# Altium PCB pai.PcbDoc
Units mil, origin at the board's own origin, x right, y up, seen from the top; angles counter-clockwise.
Board outline 2125 x 1500 mil, 2 copper layers (Component Side, Bottom Layer), stack 12.8 mil thick; 52 components, 40 nets, 134 pads, 0 vias.
Unrouted connection lines stored in the file: 92.
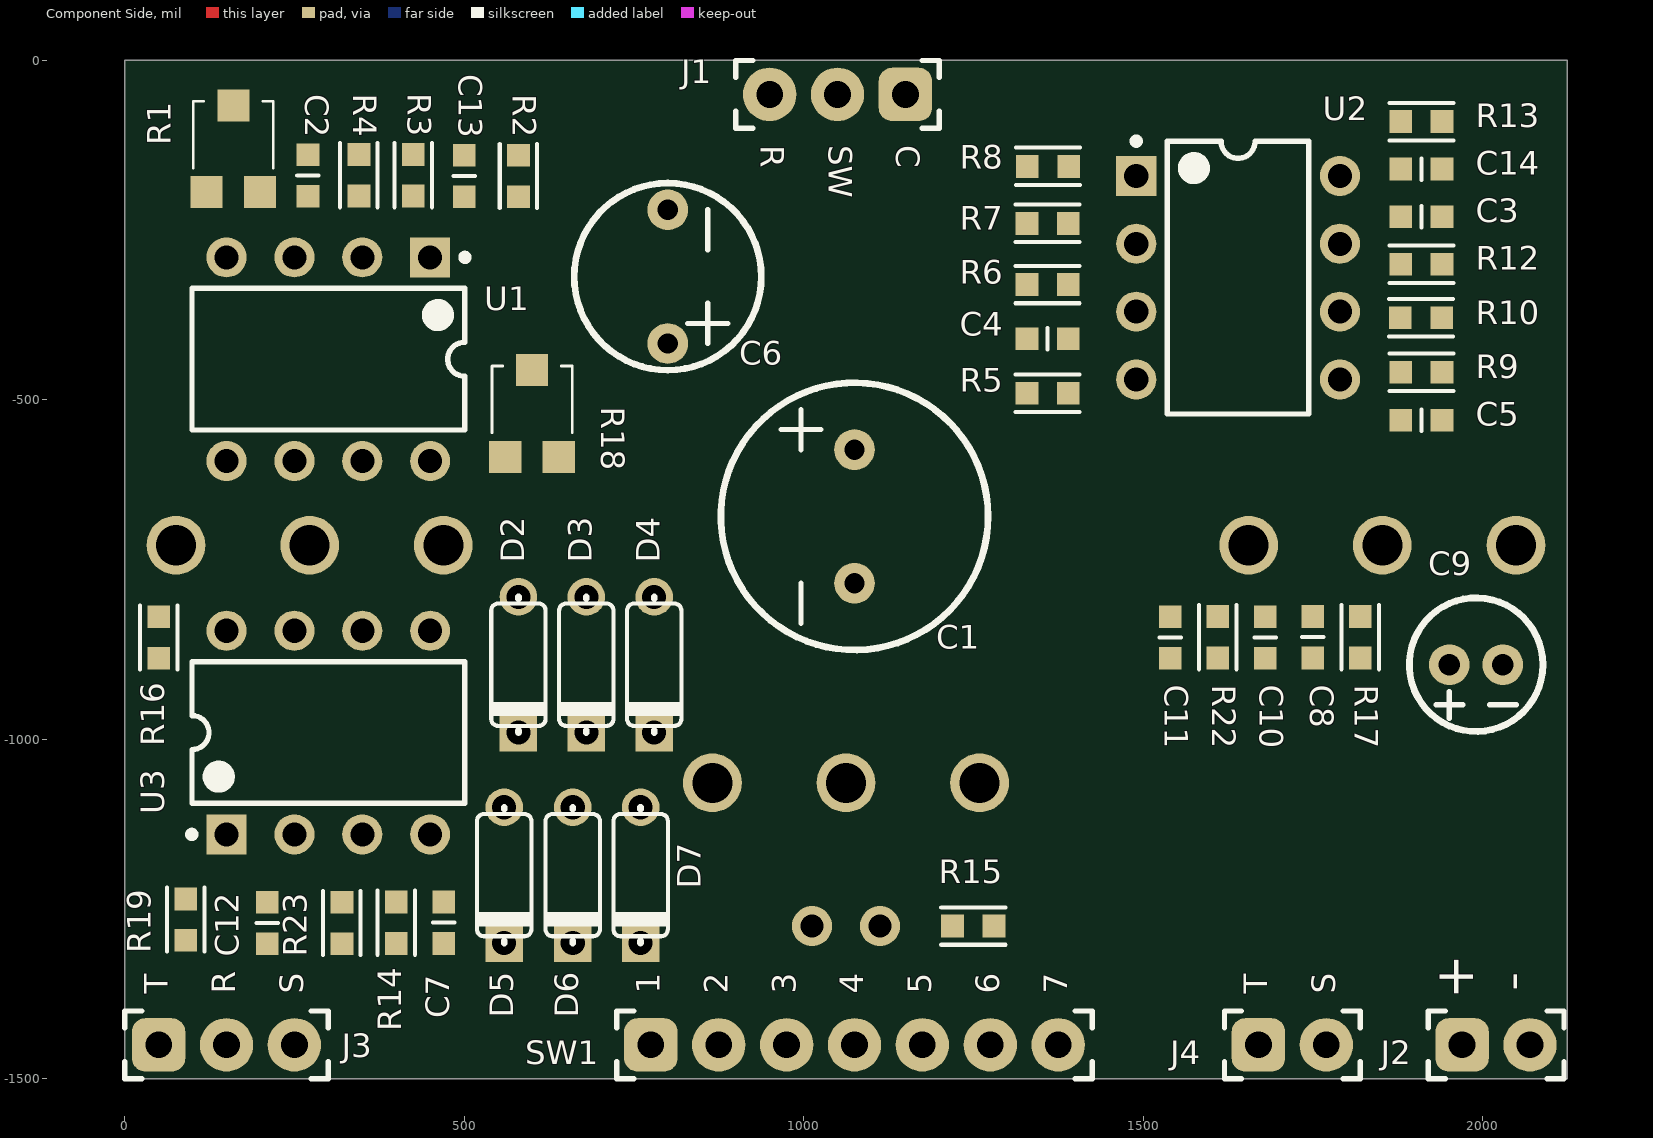
[diagram p0: Component Side view]
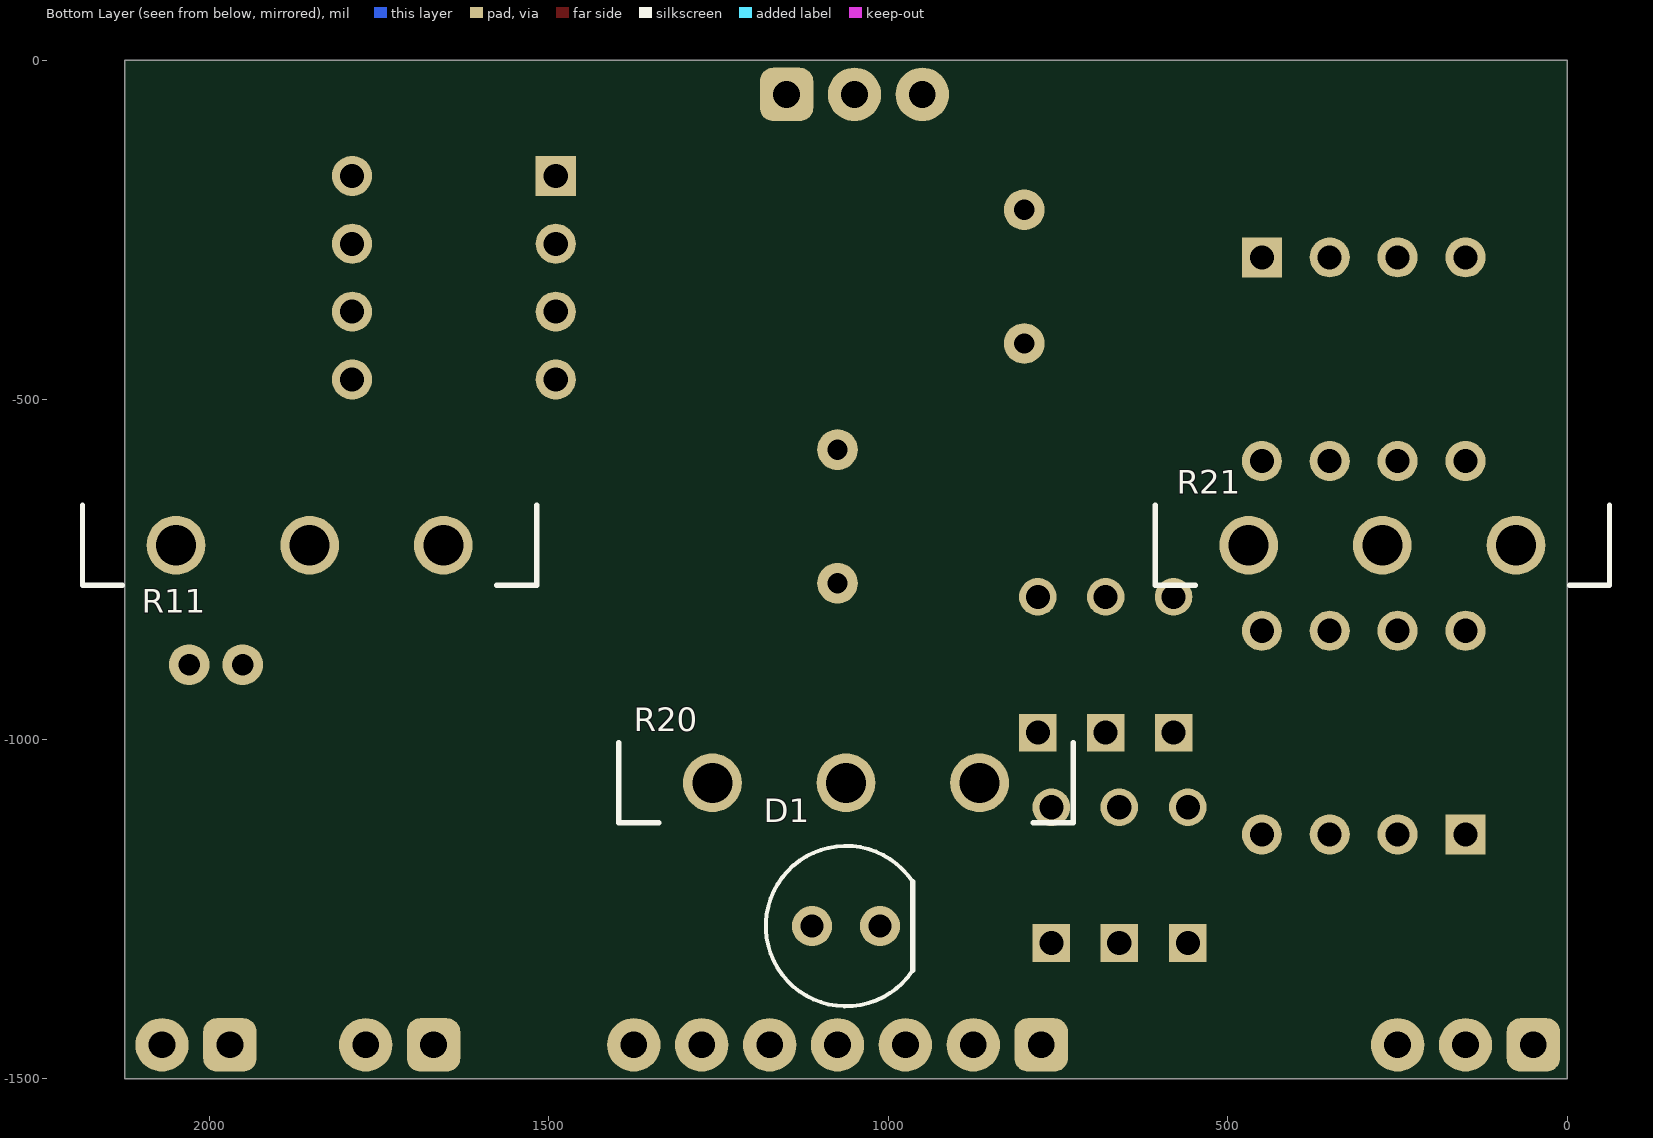
[diagram p1: Bottom Layer view, seen from below]

## Layer stack, top to bottom
Top Solder: solder mask 0.4, Solder Resist, Dk 3.5
Component Side: signal copper 1.4
Dielectric 1: core 10, FR-4, Dk 4.2
Bottom Layer: signal copper 1.4
Solder Side: solder mask 0.4, Solder Resist, Dk 3.5

## Board outline
0,-1500 2125,-1500 2125,0 0,0

## Design rules (kind name [scope] priority, off if disabled: settings)
Clearance [All] p1: gap=10 ignorepadtopadclearanceinfootprint=FALSE except(0: Arc-Hole Track-Hole SMDPad-Hole THPad-Hole Via-Hole Fill-Hole Poly-Hole Region-Hole Text-Hole)
ComponentClearance [All] p1: gap=5 collisioncheckmode=3 verticalgap=10 showdistances=FALSE
Height [All] p1: minheight=0 maxheight=3000 prefheight=500
PolygonConnect [All] p1: connectstyle=Relief reliefconductorwidth=10 reliefentries=4 polygonreliefangle="90 Angle" airgapwidth=10
RoutingVias [All] p1: holewidth=28 width=50 viastyle="Through Hole" minholewidth=28 minwidth=50 maxholewidth=28 maxwidth=50
SolderMaskExpansion [All] p1: expansion=4
Width [All] p1: maxlimit=10 minlimit=10 preferedwidth=10
28 further rules are at their usual default settings.

## Components (designator, comment, footprint, x,y, rotation, side; value= is the part's Value field where it differs from the comment)
C1 "CAP-POL" CAP_TH_10X14_L5 1075,-671.57 r270 top value=220uF
C2 "0.22µF" SMD-0603C 270,-169.49 r180 top
C3 "4700pF" SMD-0603C 1910,-230 r270 top
C4 "0.15µF" SMD-0603C 1359.49,-410 r90 top
C5 "10000pF" SMD-0603C 1910,-530 r90 top
C6 "CAP-POL" CAP_TH_5X12_L5 800,-318.43 r90 top value=10uF
C7 "0.22µF" SMD-0603C 470,-1270 r0 top
C8 "10000pF" SMD-0603C 1750,-849.49 r180 top
C9 "CAP-POL" CAP_TH_5X12_L2 1990.63,-890 r0 top value=4.7uF
C10 "1µF" SMD-0603C 1680,-850 r0 top
C11 "10000pF" SMD-0603C 1540,-850 r0 top
C12 "15pF" SMD-0603C 210,-1270.51 r180 top
C13 "1µF" SMD-0603C 500,-170 r180 top
C14 "1µF" SMD-0603C 1910,-160 r90 top
D1 "LED-Blue" LED_TH_5MM_BLUE 1062.5,-1275 r90 bottom locked
D2 "DIO-GEN" DO35-2_1N914 580,-890 r90 top
D3 "DIO-GEN" DO35-2_1N914 680,-890 r90 top
D4 "DIO-GEN" DO35-2_1N914 780,-890 r90 top
D5 "DIO-GEN" DO35-2_1N914 558.98,-1200 r90 top
D6 "DIO-GEN" DO35-2_1N914 660,-1200 r90 top
D7 "DIO-GEN" DO35-2_1N914 760,-1200 r90 top
J1 "PWR_JACK_SW" PWR_JACK_SW_HDR 1150,-50 r270 top locked
J2 "9V_BATT" PWR_JACK_HDR 1970,-1450 r90 top locked
J3 "STEREO_JACK" STEREO_JACK_HDR 50,-1450 r90 top locked
J4 "MONO_JACK" MONO_JACK_HDR 1670,-1450 r90 top locked
R1 "POT" POT_TT35W 160,-130 r90 top value=1k
R2 "47" SMD-0603-RES 580,-170 r0 top
R3 "220k" SMD-0603-RES 425,-168.98 r180 top
R4 "220k" SMD-0603-RES 345,-168.98 r0 top
R5 "1M" SMD-0603-RES 1359.49,-490 r270 top
R6 "56k" SMD-0603-RES 1359.49,-330 r90 top
R7 "330k" SMD-0603-RES 1359.49,-240 r90 top
R8 "10k" SMD-0603-RES 1360,-156 r270 top
R9 "47k" SMD-0603-RES 1910,-459.02 r270 top
R10 "560k" SMD-0603-RES 1909.49,-379.02 r90 top
R11 "POT" POT_16MM_TH_RA 1852.5,-714 r180 bottom locked value=10k
R12 "62k" SMD-0603-RES 1910,-300 r270 top
R13 "47" SMD-0603-RES 1910,-90 r90 top
R14 "820k" SMD-0603-RES 400,-1270 r0 top
R15 "1.2k" SMD-0603-RES 1250,-1275 r90 top
R16 "1M" SMD-0603-RES 50,-850 r0 top
R17 "1.2k" SMD-0603-RES 1820,-849.49 r0 top
R18 "POT" POT_TT35W 600,-520 r90 top value=1k
R19 "8.2k" SMD-0603-RES 90,-1265.51 r180 top
R20 "POT" POT_16MM_TH_RA 1062.5,-1064 r180 bottom locked value=10k
R21 "POT" POT_16MM_TH_RA 272.5,-714 r180 bottom locked value=100k
R22 "5.23k" SMD-0603-RES 1610,-849.49 r180 top
R23 "470k" SMD-0603-RES 320,-1270.51 r180 top
SW1 "3PDT_SW_SOLDERBOARD" 3PDT_HDR 775,-1450 r90 top locked
U1 "UA741CP" TI-P8 300,-440 r270 top
U2 "RC4558P" TI-P8 1640,-320 r0 top
U3 "UA741CP" TI-P8 300,-990 r90 top

## Footprints (in the part's own frame and the unit in brackets; to place one, negate y for a bottom-side part, rotate by r counter-clockwise, add the part's x,y. Pads: shape width x height; smd on the part's side, far side on the other; paste and mask are expansions set on the pad)
3PDT_HDR [mm] "3PDT Switch on Mammoth Solder-Assist Board, Header Connection"
  rrect50% 2x2 / inner round 2 / far side rrect50% 2x2 hole 1: 1(0,0)
  round 2 hole 1: 2(0,-2.54) 3(0,-5.08) 4(0,-7.62) 5(0,-10.16) 6(0,-12.7) 7(0,-15.24)
  silkscreen extent -1.27,-16.51 1.27,1.27
CAP_TH_5X12_L2 [mil] "Cap, Aluminum Electrolytic, 2mm Lead Spacing, 12.5mm Height, Vertical Mount"
  round 60 hole 31.5: 1(-39.37,0) 2(39.37,0)
  silkscreen extent -98,-98 98,98, body extent -98,-98 98,98, height 433
CAP_TH_5X12_L5 [mil] "Cap, Aluminum Electrolytic, 5mm Lead Spacing, 12mm Height, Vertical Mount"
  round 60 hole 30: 1(-98.43,0) 2(98.43,0)
  silkscreen extent -138,-138 138,138, body extent -124,-124 124,124, height 472
CAP_TH_10X14_L5 [mil] "Cap, Aluminum Electrolytic, 5mm Lead Spacing, 14mm Height, Vertical Mount"
  round 60 hole 30: 1(-98.43,0) 2(98.43,0)
  silkscreen extent -197,-197 197,197, body extent -197,-197 197,197, height 551
DO35-2_1N914 [mm]
  round 1.408 hole 0.9: A(2.54,0)
  rect 1.408x1.408 hole 0.9: K(-2.54,0)
  silkscreen extent -2.54,-1.02 2.54,1.02
LED_TH_5MM_BLUE [mm] "LED, 5mm Through-Hole, Blue"
  round 1.5 hole 0.85: A(0,1.27) K(0,-1.27)
  silkscreen extent -3,-2.5 3,3, body extent -3,-2.43 3.02,2.99, height 14.31
MONO_JACK_HDR [mm] "Audio Jack, Mono, No Switch, Header Connection"
  round 2 hole 1: S(0,-2.54)
  rrect50% 2x2 / inner round 2 / far side rrect50% 2x2 hole 1: T(0,0)
  silkscreen extent -1.27,-3.81 1.27,1.27
POT_16MM_TH_RA [mm] "Potentiometer, 16mm, Through-Hole, Right-Angle"
  round 2.2 hole 1.5: 1(-5,0) 2(0,0) 3(5,0)
  silkscreen extent -8.5,-1.5 8.5,1.5, body extent -8.5,8 8.5,25, height 27.4
POT_TT35W [mm] "Trimmer, 0.1W, Top Adjust"
  rect 1.2x1.2 smd: 1(-1.625,1) 2(1.625,0) 3(-1.625,-1)
  silkscreen extent -0.72,-1.5 1.78,1.5, body extent -1.92,-1.5 1.73,1.5, height 1.81
PWR_JACK_HDR [mm] "DC Power Jack Connector, Header Connections"
  rrect50% 2x2 / inner round 2 / far side rrect50% 2x2 hole 1: 1(0,0)
  round 2 hole 1: 2(0,-2.54)
  silkscreen extent -1.27,-3.81 1.27,1.27
PWR_JACK_SW_HDR [mm] "DC Power Jack Connector with Switch, Header Connection"
  rrect50% 2x2 / inner round 2 / far side rrect50% 2x2 hole 1: C(0,0)
  round 2 hole 1: R(0,-5.08) SW(0,-2.54)
  silkscreen extent -1.27,-6.35 1.27,1.27
SMD-0603-RES [mm]
  rect 0.85x0.85 smd: 1(0,0.775) 2(0,-0.775)
  silkscreen extent -0.7,-1.2 0.7,1.2, body extent -0.4,-0.85 0.4,0.85, height 0.56
SMD-0603C [mm]
  rect 0.85x0.85 smd: 1(0,0.775) 2(0,-0.775)
  silkscreen extent -0.4,0 0.4,0, body extent -0.4,-0.8 0.4,0.8, height 0.9
STEREO_JACK_HDR [mm] "Stereo Jack Connector, Panel Mount, Header Connection"
  round 2 hole 1: R(0,-2.54) S(0,-5.08)
  rrect50% 2x2 / inner round 2 / far side rrect50% 2x2 hole 1: T(0,0)
  silkscreen extent -1.27,-6.35 1.27,1.27
TI-P8 [mm] "DIP, 8-Leads, Body 9.59x6.35mm, Pitch 2.54mm"
  rect 1.5x1.5 hole 0.9: 1(-3.81,3.81)
  round 1.5 hole 0.9: 2(-3.81,1.27) 3(-3.81,-1.27) 4(-3.81,-3.81) 5(3.81,-3.81) 6(3.81,-1.27) 7(3.81,1.27) 8(3.81,3.81)
  silkscreen extent -3.93,-5.1 2.65,5.24, body extent -3.95,-5.07 3.95,5.07, height 5.08

## Part data
C1: library part CAP-TH-0002, "CAP ALUM 220UF 20% 35V THRU HOLE", Lifetime @ Temp=2000, Manufacturer 1=KEMET, Manufacturer 1 PN=ESH227M035AH9AA, Operating Temperature="-40°C ~ 105°C", Package / Case="Radial, Can", Ripple Current @ High Frequency="472.5mA @ 10kHz", Ripple Current @ Low Frequency="315Ma @ 120Hz", Tolerance=20%, Voltage-Rated=35V, ESR=-, Height - Seated (Max)="0.551\" (14.00mm)", Lead Spacing="0.197\" (5.00mm)", Mounting Type="Through Hole", Polarization=Polar, Size / Dimension="0.394\" Dia (10.00mm)", Supplier 1=Digi-Key, Supplier 1 Link=https://www.digikey.com/product-detail/en/kemet/ESH227M035AH9AA/399-15681-ND/7423187, Supplier 1 PN=399-15681-ND, TPN=CAP-TH-0002
C2 C7: library part GRM188R71E224KA88D, "CAP CER 0.22UF 25V X7R 0603", Digi-Key Part Number=490-3290-1-ND, Manufacturer="Murata Electronics North America", Operating Temperature="-55°C ~ 125°C", Package / Case=0603, Ratings=-, Temperature Coefficient=X7R, Tolerance=±10%, Voltage=25V, @ qty=0, Applications="General Purpose", Datasheets=http://www.murata.com/~/media/webrenewal/support/library/catalog/products/capacitor/mlcc/c02e.pdf, Factory Stock=0, Features=-, Height - Seated (Max)=-, Image=//media.digikey.com/Renders/Murata%20Renders/ZRB-SERIES-0402.jpg, Lead Spacing=-, Lead Style=-, Minimum Quantity=1, Mounting Type="Surface Mount, MLCC", Packaging="Cut Tape (CT)", Part Number=GRM188R71E224KA88D, Part Status=Active, Quantity Available=323168, Series=GRM, Size / Dimension="0.063\" L x 0.031\" W (1.60mm x 0.80mm)", Thickness (Max)="0.035\" (0.90mm)", Unit Price (USD)=0.14
C3: library part GCM188R71E472KA37D, "CAP CER 4700PF 25V X7R 0603", Digi-Key Part Number=490-11959-1-ND, Manufacturer="Murata Electronics North America", Operating Temperature="-55°C ~ 125°C", Package / Case=0603, Ratings=AEC-Q200, Temperature Coefficient=X7R, Tolerance=±10%, Voltage=25V, @ qty=0, Applications=Automotive, Datasheets=http://www.murata.com/~/media/webrenewal/support/library/catalog/products/capacitor/mlcc/c03e.ashx, Factory Stock=0, Features=-, Height - Seated (Max)=-, Image=//media.digikey.com/Renders/Murata%20Renders/0603%28GCM188%29.jpg, Lead Spacing=-, Lead Style=-, Minimum Quantity=1, Mounting Type="Surface Mount, MLCC", Packaging="Cut Tape (CT)", Part Number=GCM188R71E472KA37D, Part Status=Active, Quantity Available=3228, Series=GCM, Size / Dimension="0.063\" L x 0.031\" W (1.60mm x 0.80mm)", Thickness (Max)="0.035\" (0.90mm)", Unit Price (USD)=0.1
C4: library part GCM188R71H154KA64D, "CAP CER 0.15UF 50V X7R 0603", Digi-Key Part Number=490-11960-1-ND, Manufacturer="Murata Electronics North America", Operating Temperature="-55°C ~ 125°C", Package / Case=0603, Ratings=AEC-Q200, Temperature Coefficient=X7R, Tolerance=±10%, Voltage=50V, @ qty=0, Applications=Automotive, Datasheets=http://www.murata.com/~/media/webrenewal/support/library/catalog/products/capacitor/mlcc/c03e.ashx, Factory Stock=0, Features=-, Height - Seated (Max)=-, Image=//media.digikey.com/Renders/Murata%20Renders/0603%28GCM188%29.jpg, Lead Spacing=-, Lead Style=-, Minimum Quantity=1, Mounting Type="Surface Mount, MLCC", Packaging="Cut Tape (CT)", Part Number=GCM188R71H154KA64D, Part Status=Active, Quantity Available=3950, Series=GCM, Size / Dimension="0.063\" L x 0.031\" W (1.60mm x 0.80mm)", Thickness (Max)="0.035\" (0.90mm)", Unit Price (USD)=0.19
C5 C8 C11: library part GRM188R71E103KA01J, "CAP CER 10000PF 25V X7R 0603", Digi-Key Part Number=490-11997-1-ND, Manufacturer="Murata Electronics North America", Operating Temperature="-55°C ~ 125°C", Package / Case=0603, Ratings=-, Temperature Coefficient=X7R, Tolerance=±10%, Voltage=25V, @ qty=0, Applications="General Purpose", Datasheets=http://www.murata.com/~/media/webrenewal/support/library/catalog/products/capacitor/mlcc/c02e.pdf, Factory Stock=0, Features=-, Height - Seated (Max)=-, Image=//media.digikey.com/Renders/Murata%20Renders/ZRB-SERIES-0402.jpg, Lead Spacing=-, Lead Style=-, Minimum Quantity=1, Mounting Type="Surface Mount, MLCC", Packaging="Cut Tape (CT)", Part Number=GRM188R71E103KA01J, Part Status=Active, Quantity Available=8531, Series=GRM, Size / Dimension="0.063\" L x 0.031\" W (1.60mm x 0.80mm)", Thickness (Max)="0.035\" (0.90mm)", Unit Price (USD)=0.1
C6: library part CAP-TH-0001, "CAP ALUM 10UF 20% 25V RADIAL", Lifetime @ Temp=2000, Manufacturer 1="Panasonic Electronic Components", Manufacturer 1 PN=ECA-1EM100B, Operating Temperature="-40°C ~ 85°C", Package / Case="Radial, Can", Ripple Current @ High Frequency="85mA @ 10kHz", Ripple Current @ Low Frequency="50mA @ 120Hz", Tolerance=20%, Voltage-Rated=25V, ESR=-, Height - Seated (Max)="0.472\" (12.00mm)", Lead Spacing="0.197\" (5.00mm)", Mounting Type="Through Hole", Polarization=Polar, Size / Dimension="0.197\" Dia (5.00mm))", Supplier 1=Digi-Key, Supplier 1 Link=https://www.digikey.com/product-detail/en/panasonic-electronic-components/ECA-1EM100B/P19522CT-ND/6109420, Supplier 1 PN=P19522CT-ND, TPN=CAP-TH-0001
C9: library part CAP-TH-0003, "CAP ALUM 4.7UF 20% 25V RADIAL", Lifetime @ Temp=2000, Manufacturer 1="Wurth Electronics Inc.", Manufacturer 1 PN=860020472001, Operating Temperature="-40°C ~ 105°C", Package / Case="Radial, Can", Ripple Current @ High Frequency="44.2mA @ 100kHz", Ripple Current @ Low Frequency="26mA @ 120Hz", Tolerance=20%, Voltage-Rated=25V, ESR=-, Height - Seated (Max)="0.492\"(12.5mm)", Lead Spacing="0.079\" (2.00mm)", Mounting Type="Through Hole", Polarization=Polar, Size / Dimension="0.1o97\" Dia (5.00mm)", Supplier 1=Digi-Key, Supplier 1 Link=https://www.digikey.com/product-detail/en/wurth-electronics-inc/860020472001/732-8818-1-ND/5728763, Supplier 1 PN=732-8818-1-ND, TPN=CAP-TH-0003
C10 C13 C14: library part GRM188R71E105KA12D, "CAP CER 1UF 25V X7R 0603", Digi-Key Part Number=490-5307-1-ND, Manufacturer="Murata Electronics North America", Operating Temperature="-55°C ~ 125°C", Package / Case=0603, Ratings=-, Temperature Coefficient=X7R, Tolerance=±10%, Voltage=25V, @ qty=0, Applications="General Purpose", Datasheets=http://www.murata.com/~/media/webrenewal/support/library/catalog/products/capacitor/mlcc/c02e.pdf, Factory Stock=0, Features=-, Height - Seated (Max)=-, Image=//media.digikey.com/Renders/Murata%20Renders/ZRB-SERIES-0402.jpg, Lead Spacing=-, Lead Style=-, Minimum Quantity=1, Mounting Type="Surface Mount, MLCC", Packaging="Cut Tape (CT)", Part Number=GRM188R71E105KA12D, Part Status=Active, Quantity Available=513860, Series=GRM, Size / Dimension="0.063\" L x 0.031\" W (1.60mm x 0.80mm)", Thickness (Max)="0.035\" (0.90mm)", Unit Price (USD)=0.24
C12: library part GCM1885C1H150JA16D, "CAP CER 15PF 50V NP0 0603", Digi-Key Part Number=490-4957-1-ND, Manufacturer="Murata Electronics North America", Operating Temperature="-55°C ~ 125°C", Package / Case=0603, Ratings=AEC-Q200, Temperature Coefficient="C0G, NP0", Tolerance=±5%, Voltage=50V, @ qty=0, Applications=Automotive, Datasheets=http://www.murata.com/~/media/webrenewal/support/library/catalog/products/capacitor/mlcc/c03e.ashx, Factory Stock=0, Features=-, Height - Seated (Max)=-, Image=//media.digikey.com/Renders/Murata%20Renders/0603%28GCM188%29.jpg, Lead Spacing=-, Lead Style=-, Minimum Quantity=1, Mounting Type="Surface Mount, MLCC", Packaging="Cut Tape (CT)", Part Number=GCM1885C1H150JA16D, Part Status=Active, Quantity Available=99209, Series=GCM, Size / Dimension="0.063\" L x 0.031\" W (1.60mm x 0.80mm)", Thickness (Max)="0.035\" (0.90mm)", Unit Price (USD)=0.1
D1: library part LED-0003, "LED BLUE CLEAR T-1 3/4 T/H", Color=Blue, Current - Test=20mA, Lens Color=Colorless, Manufacturer 1="Lite-On Inc.", Manufacturer 1 PN=LTL2T3TBK5, Millicandela Rating=1200mcd, Package / Case=Radial, Supplier Device Package="T-1 3/4", Voltage - Forward (Vf) (Typ)=3.5V, Configuration=Standard, Features=-, Height (Max)=8.70mm, Lens Size="5mm, T-1 3/4", Lens Style="Round with Domed Top", Lens Transparency=Clear, Mounting Type="Through Hole", Size / Dimension=-, Supplier 1=Digi-Key, Supplier 1 Link=https://www.digikey.com/product-detail/en/lite-on-inc/LTL2T3TBK5/160-1610-ND/573515, Supplier 1 PN=160-1610-ND, TPN=LED-0003, Viewing Angle=30°, Wavelength - Dominant=470nm, Wavelength - Peak=468nm
D2 D3 D4 D5 D6 D7: library part DIO-GEN-0001, "DIODE GEN PURP 75V 200MA DO35", Capacitance @ Vr, F="4pF @ 0V, 1MHz", Current - Average Rectified (Io)=200mA, Current - Reverse Leakage @ Vr="500nA @ 75V", Manufacturer 1="Microsemi Corporation", Manufacturer 1 PN=1N914, Operating Temperature - Junction="-65°C ~ 175°C", Package / Case="DO-204AH, DO-35, Axial", Voltage - DC Reverse (Vr) (Max)=75V, Voltage - Forward (Vf) (Max) @ If="1.2V @ 50mA", Mounting Type="Through Hole", Speed="Small Signal =< 200mA (Io), Any Speed", Supplier 1=Digi-Key, Supplier 1 Link=https://www.digikey.com/product-detail/en/microsemi-corporation/1N914/1N914MS-ND/4377361, Supplier 1 PN=1N914MS-ND, Supplier Device Packaging="DO-35 (DO-204AH)", TPN=DIO-GEN-0001
J1: library part PWR-CN-0001, "CONN PWR JACK 2X5.5MM SOLDER", Body Color=Black, Current Rating=2A, Insulation Color=-, Manufacturer 1="CUI Inc.", Manufacturer 1 PN=PJ-011A, Material Flammability Rating="UL94 V-0", Voltage - Rated=12VDC, Actual Diameter="0.079\" (2.00mm ID), 0.236\" (6.00mm OD)", Body Material=-, Connector Type=Jack, Contact Material="Brass; Copper Alloy", Contact Material - Plating=Nickel, Features="Mounting Hardware, Thread Lock", Gender=Male, Housing Material="Polyoxymethylene (POM)", Includes="2 pcs - 1 Connector, 1 Nut", Industry Recognized Mating Diamter="2.10mm ID (0.083\"), 5.50mm OD (0.217\")", Ingress Protection=-, Internal Switch(s)="Single Switch, Normally Closed", Mating Length / Depth=-, Mounting Feature="Bulkhead - Front Side Nut", Mounting Type="Panel Mount", Number of Positions/Contacts="2 Conductors, 3 Contacts", Operating Temperature=-, Shielding=Unshielded, Supplier 1=Digi-Key, Supplier 1 Link=https://www.digikey.com/product-detail/en/cui-inc/PJ-011A/CP-011A-ND/305540, Supplier 1 PN=CP-011A-ND, Termination="Solder Eyelet(s)", Thread Size=-, TPN=PWR-CN-0001
J2: library part BATT-0001, "BATTERY CONNECT SNAP 9V 4\" LEADS", Manufacturer 1="Keystone Electronics", Manufacturer 1 PN=232, Operating Temperature=-, Battery Cell Size=9V, Battery Series=-, Battery Type Function=9, Height Above Board=-, Mounting Type="Free Hanging", Number of Cells=1, Style="Connector, Snap", Supplier 1=Digi-Key, Supplier 1 Link=https://www.digikey.com/product-detail/en/keystone-electronics/232/36-232-ND/303804, Supplier 1 PN=36-232-ND, Termination Style="Wire Leads - 4\" (101.6mm)", TPN=BATT-0001
J3: library part AUD-CN-0001, "CONN JACK STEREO 6.35MM PNL MNT", Body Color=Silver, Current Rating=1A, Insulation Color=-, Manufacturer 1="Switchcraft Inc", Manufacturer 1 PN=12B, Manufacturer 2="Mammoth Electronics", Manufacturer 2 PN=JK100S, Operating Temperature="-20°C ~ 65°C", Voltage - Rated=25VDC, Actual Diameter="0.25\" (6.35mm)", Body Material="Copper Alloy", Cable Opening=-, Connector Type="Phone Jack", Contact Material="Copper Alloy", Contact Material - Plating=Nickel, Features="Mounting Hardware, Thread Lock", Gender=Female, Housing Material=-, Includes="3 pcs - 1 Connector, 1 Nut, 1 Washer", Industry Recognized Mating Diameter="6.35mm (0.250\", 1/4\") - Headphone", Internal Switch(s)="Does Not Contain Switch", mating Length/Depth=-, Mounting Type="Panel Mount, Through Hole", Number of Positions/Contacts="3 Conductors, 3 Contacts", Panel Hole Size="0.375\" (9.52mm)", Series=LITTLE-JAX, Shielding=Unshielded, Singal Lines="Stereo (3 Conductor, TRS)", Supplier 1=Digi-Key, Supplier 1 Link=https://www.digikey.com/product-detail/en/switchcraft-inc/12B/SC1094-ND/109541, Supplier 1 PN=SC1094-ND, Supplier 2=https://www.mammothelectronics.com/collections/audio-jacks/products/4sjk100s, Termination="Solder Eyelet(s)", Thread Size="3/8\"-32", TPN=AUD-CN-0001
J4: library part AUD-CN-0002, "CONN JACK MONO 6.35MM PNL MNT", Body Color=Silver, Current Rating=1A, Insulation Color=-, Manufacturer 1="Switchcraft Inc", Manufacturer 1 PN=FAL11, Manufacturer 2="Mammoth Electronics", Manufacturer 2 PN=JK100M, Operating Temperature="-20°C ~ 65°C", Voltage - Rated=25VDC, Actual Diameter="0.25\" (6.35mm)", Body Material="Copper Alloy", Cable Opening=-, Connector Type="Phone Jack", Contact Material="Copper Alloy", Contact Material - Plating=Nickel, Features="Mounting Hardware, Thread Lock", Gender=Female, Housing Material=-, Includes="3 pcs - 1 Connector, 1 Nut, 1 Washer", Industry Recognized Mating Diameter="6.35mm (0.250\", 1/4\") - Headphone", Internal Switch(s)="Does Not Contain Switch", mating Length/Depth=-, Mounting Type="Panel Mount, Through Hole", Number of Positions/Contacts="2 Conductors, 2 Contacts", Panel Hole Size="0.375\" (9.52mm)", Series=LITTLE-JAX, Shielding=Unshielded, Singal Lines=Mono, Supplier 1=Digi-Key, Supplier 1 Link=https://www.digikey.com/product-detail/en/switchcraft-inc/FAL11/SC1847-ND/1289066, Supplier 1 PN=SC1847-ND, Supplier 2=https://www.mammothelectronics.com/collections/audio-jacks/products/4sjk100m, Termination="Solder Eyelet(s)", Thread Size="3/8\"-32", TPN=AUD-CN-0002
R1 R18: library part POT-0021, "Potentiometer, 1k, Linear Taper, Trim, Single Gang, Surface Mount", Manufacturer 1="TT Elecronics/Bl", Manufacturer 1 PN=35WR1KLFTR, Power (Watts)=0.1, Temperature Coefficient=±250ppm/°C, Tolerance=0.25, Mounting Type="Surface Mount", Size / Dimension="Rectangular - 0.144\" x 0.118\" Face x 0.067\" H (3.65mm x 3.00mm x 1.70mm)", Supplier 1=Digi-Key, Supplier 1 Link=https://www.digikey.com/product-detail/en/tt-electronics-bi/35WR1KLFTR/987-1812-1-ND/8111752, Supplier 1 PN=987-1812-1-ND, Taper=Linear, TPN=POT-0021
R2: library part ERJ-PA3J470V, "RES SMD 47 OHM 5% 1/4W 0603", Digi-Key Part Number=P47.00BZCT-ND, Manufacturer="Panasonic Electronic Components", Operating Temperature="-55°C ~ 155°C", Package / Case="0603 (1608 Metric)", Power (Watts)=0.25w, Supplier Device Package=0603, Temperature Coefficient=±200ppm/°C, Tolerance=±5%, @ qty=1500, Composition="Thick Film", Datasheets=https://industrial.panasonic.com/cdbs/www-data/pdf/RDA0000/AOA0000C243.pdf, Factory Stock=0, Failure Rate=-, Features="Automotive AEC-Q200, Pulse Withstanding", Height - Seated (Max)="0.022\" (0.55mm)", Image=//media.digikey.com/Photos/Panasonic%20Photos/MFG_ERJ-P6W%20Series.jpg, Minimum Quantity=1, Number of Terminations=2, Packaging="Cut Tape (CT)", Part Number=ERJ-PA3J470V, Part Status=Active, Quantity Available=4817, Series=ERJ, Size / Dimension="0.063\" L x 0.031\" W (1.60mm x 0.80mm)", Unit Price (USD)=0.01646
R3: library part ERJ-PA3J224V, "RES SMD 220K OHM 5% 1/4W 0603", Digi-Key Part Number=P220KBZCT-ND, Manufacturer="Panasonic Electronic Components", Operating Temperature="-55°C ~ 155°C", Package / Case="0603 (1608 Metric)", Power (Watts)=0.25W, Supplier Device Package=0603, Temperature Coefficient=±200ppm/°C, Tolerance=±5%, @ qty=1500, Composition="Thick Film", Datasheets=https://industrial.panasonic.com/cdbs/www-data/pdf/RDA0000/AOA0000C243.pdf, Factory Stock=0, Failure Rate=-, Features="Automotive AEC-Q200, Pulse Withstanding", Height - Seated (Max)="0.022\" (0.55mm)", Image=//media.digikey.com/Photos/Panasonic%20Photos/MFG_ERJ-P6W%20Series.jpg, Minimum Quantity=1, Number of Terminations=2, Packaging="Cut Tape (CT)", Part Number=ERJ-PA3J224V, Part Status=Active, Quantity Available=19215, Series=ERJ, Size / Dimension="0.063\" L x 0.031\" W (1.60mm x 0.80mm)", Unit Price (USD)=0.01646
R4: library part ERJ-PA3J224V, "RES SMD 220K OHM 5% 1/4W 0603", Digi-Key Part Number=P220KBZCT-ND, Manufacturer="Panasonic Electronic Components", Operating Temperature="-55°C ~ 155°C", Package / Case="0603 (1608 Metric)", Power (Watts)="0.25W, 1/4W", Supplier Device Package=0603, Temperature Coefficient=±200ppm/°C, Tolerance=±5%, @ qty=1500, Composition="Thick Film", Datasheets=https://industrial.panasonic.com/cdbs/www-data/pdf/RDA0000/AOA0000C243.pdf, Factory Stock=0, Failure Rate=-, Features="Automotive AEC-Q200, Pulse Withstanding", Height - Seated (Max)="0.022\" (0.55mm)", Image=//media.digikey.com/Photos/Panasonic%20Photos/MFG_ERJ-P6W%20Series.jpg, Minimum Quantity=1, Number of Terminations=2, Packaging="Cut Tape (CT)", Part Number=ERJ-PA3J224V, Part Status=Active, Quantity Available=19215, Series=ERJ, Size / Dimension="0.063\" L x 0.031\" W (1.60mm x 0.80mm)", Unit Price (USD)=0.01646
R5 R16: library part ERJ-3GEYJ105V, "RES SMD 1M OHM 5% 1/10W 0603", Digi-Key Part Number=P1.0MGCT-ND, Manufacturer="Panasonic Electronic Components", Operating Temperature="-55°C ~ 155°C", Package / Case="0603 (1608 Metric)", Power (Watts)="0.1W, 1/10W", Supplier Device Package=0603, Temperature Coefficient=±200ppm/°C, Tolerance=±5%, @ qty=1500, Composition="Thick Film", Datasheets=http://industrial.panasonic.com/www-cgi/jvcr13pz.cgi?E+PZ+3+AOA0001+ERJ3GEYJ105V+7+WW, Factory Stock=0, Failure Rate=-, Features="Automotive AEC-Q200", Height - Seated (Max)="0.022\" (0.55mm)", Image=//media.digikey.com/Photos/Panasonic%20Photos/MFG_ERJ-P6W%20Series.jpg, Minimum Quantity=1, Number of Terminations=2, Packaging="Cut Tape (CT)", Part Number=ERJ-3GEYJ105V, Part Status=Active, Quantity Available=250051, Series=ERJ, Size / Dimension="0.063\" L x 0.031\" W (1.60mm x 0.80mm)", Unit Price (USD)=0.00321
R6: library part ERJ-3GEYJ563V, "RES SMD 56K OHM 5% 1/10W 0603", Digi-Key Part Number=P56KGCT-ND, Manufacturer="Panasonic Electronic Components", Operating Temperature="-55°C ~ 155°C", Package / Case="0603 (1608 Metric)", Power (Watts)="0.1W, 1/10W", Supplier Device Package=0603, Temperature Coefficient=±200ppm/°C, Tolerance=±5%, @ qty=1500, Composition="Thick Film", Datasheets=http://industrial.panasonic.com/www-cgi/jvcr13pz.cgi?E+PZ+3+AOA0001+ERJ3GEYJ563V+7+WW, Factory Stock=0, Failure Rate=-, Features="Automotive AEC-Q200", Height - Seated (Max)="0.022\" (0.55mm)", Image=//media.digikey.com/Photos/Panasonic%20Photos/MFG_ERJ-P6W%20Series.jpg, Minimum Quantity=1, Number of Terminations=2, Packaging="Cut Tape (CT)", Part Number=ERJ-3GEYJ563V, Part Status=Active, Quantity Available=76734, Series=ERJ, Size / Dimension="0.063\" L x 0.031\" W (1.60mm x 0.80mm)", Unit Price (USD)=0.00321
R7: library part ERJ-3GEYJ334V, "RES SMD 330K OHM 5% 1/10W 0603", Digi-Key Part Number=P330KGCT-ND, Manufacturer="Panasonic Electronic Components", Operating Temperature="-55°C ~ 155°C", Package / Case="0603 (1608 Metric)", Power (Watts)="0.1W, 1/10W", Supplier Device Package=0603, Temperature Coefficient=±200ppm/°C, Tolerance=±5%, @ qty=1500, Composition="Thick Film", Datasheets=http://industrial.panasonic.com/www-cgi/jvcr13pz.cgi?E+PZ+3+AOA0001+ERJ3GEYJ334V+7+WW, Factory Stock=0, Failure Rate=-, Features="Automotive AEC-Q200", Height - Seated (Max)="0.022\" (0.55mm)", Image=//media.digikey.com/Photos/Panasonic%20Photos/MFG_ERJ-P6W%20Series.jpg, Minimum Quantity=1, Number of Terminations=2, Packaging="Cut Tape (CT)", Part Number=ERJ-3GEYJ334V, Part Status=Active, Quantity Available=347903, Series=ERJ, Size / Dimension="0.063\" L x 0.031\" W (1.60mm x 0.80mm)", Unit Price (USD)=0.00321
R8: library part ERJ-3GEYJ103V, "RES SMD 10K OHM 5% 1/10W 0603", Digi-Key Part Number=P10KGCT-ND, Manufacturer="Panasonic Electronic Components", Operating Temperature="-55°C ~ 155°C", Package / Case="0603 (1608 Metric)", Power (Watts)="0.1W, 1/10W", Supplier Device Package=0603, Temperature Coefficient=±200ppm/°C, Tolerance=±5%, @ qty=1500, Composition="Thick Film", Datasheets=http://industrial.panasonic.com/www-cgi/jvcr13pz.cgi?E+PZ+3+AOA0001+ERJ3GEYJ103V+7+WW, Factory Stock=0, Failure Rate=-, Features="Automotive AEC-Q200", Height - Seated (Max)="0.022\" (0.55mm)", Image=//media.digikey.com/Photos/Panasonic%20Photos/MFG_ERJ-P6W%20Series.jpg, Minimum Quantity=1, Number of Terminations=2, Packaging="Cut Tape (CT)", Part Number=ERJ-3GEYJ103V, Part Status=Active, Quantity Available=7178118, Series=ERJ, Size / Dimension="0.063\" L x 0.031\" W (1.60mm x 0.80mm)", Unit Price (USD)=0.00321
R9: library part ERJ-3GEYJ473V, "RES SMD 47K OHM 5% 1/10W 0603", Digi-Key Part Number=P47KGCT-ND, Manufacturer="Panasonic Electronic Components", Operating Temperature="-55°C ~ 155°C", Package / Case=0603, Power (Watts)="0.1W, 1/10W", Temperature Coefficient=±200ppm/°C, Tolerance=±5%, @ qty=1500, Composition="Thick Film", Datasheets=http://industrial.panasonic.com/www-cgi/jvcr13pz.cgi?E+PZ+3+AOA0001+ERJ3GEYJ473V+7+WW, Factory Stock=0, Failure Rate=-, Features="Automotive AEC-Q200", Height - Seated (Max)="0.022\" (0.55mm)", Image=//media.digikey.com/Photos/Panasonic%20Photos/MFG_ERJ-P6W%20Series.jpg, Minimum Quantity=1, Number of Terminations=2, Packaging="Cut Tape (CT)", Part Number=ERJ-3GEYJ473V, Part Status=Active, Quantity Available=661986, Series=ERJ, Size / Dimension="0.063\" L x 0.031\" W (1.60mm x 0.80mm)", Supplier Device Package=0603, Unit Price (USD)=0.00321
R10: library part ERJ-3GEYJ564V, "RES SMD 560K OHM 5% 1/10W 0603", Digi-Key Part Number=P560KGCT-ND, Manufacturer="Panasonic Electronic Components", Operating Temperature="-55°C ~ 155°C", Package / Case="0603 (1608 Metric)", Power (Watts)="0.1W, 1/10W", Supplier Device Package=0603, Temperature Coefficient=±200ppm/°C, Tolerance=±5%, @ qty=1500, Composition="Thick Film", Datasheets=http://industrial.panasonic.com/www-cgi/jvcr13pz.cgi?E+PZ+3+AOA0001+ERJ3GEYJ564V+7+WW, Factory Stock=0, Failure Rate=-, Features="Automotive AEC-Q200", Height - Seated (Max)="0.022\" (0.55mm)", Image=//media.digikey.com/Photos/Panasonic%20Photos/MFG_ERJ-P6W%20Series.jpg, Minimum Quantity=1, Number of Terminations=2, Packaging="Cut Tape (CT)", Part Number=ERJ-3GEYJ564V, Part Status=Active, Quantity Available=49313, Series=ERJ, Size / Dimension="0.063\" L x 0.031\" W (1.60mm x 0.80mm)", Unit Price (USD)=0.00321
R11 R20: library part POT-0004, "Potentiometer, 10k, Linear Taper, 16mm, Single Gang, TH RA", Manufacturer 1=Mammoth, Manufacturer 1 PN=B10K, Power (Watts)=0.25, Tolerance=0.05, Mounting Type="Through-Hole, Right Angle", Supplier 1="Mammoth Electronics", Supplier 1 PN=B10K, Taper=Linear, TPN=POT-0004
R12: library part ERJ-3GEYJ623V, "RES SMD 62K OHM 5% 1/10W 0603", Digi-Key Part Number=P62KGCT-ND, Manufacturer="Panasonic Electronic Components", Operating Temperature="-55°C ~ 155°C", Package / Case="0603 (1608 Metric)", Power (Watts)="0.1W, 1/10W", Supplier Device Package=0603, Temperature Coefficient=±200ppm/°C, Tolerance=±5%, @ qty=1500, Composition="Thick Film", Datasheets=http://industrial.panasonic.com/www-cgi/jvcr13pz.cgi?E+PZ+3+AOA0001+ERJ3GEYJ623V+7+WW, Factory Stock=0, Failure Rate=-, Features="Automotive AEC-Q200", Height - Seated (Max)="0.022\" (0.55mm)", Image=//media.digikey.com/Photos/Panasonic%20Photos/MFG_ERJ-P6W%20Series.jpg, Minimum Quantity=1, Number of Terminations=2, Packaging="Cut Tape (CT)", Part Number=ERJ-3GEYJ623V, Part Status=Active, Quantity Available=62166, Series=ERJ, Size / Dimension="0.063\" L x 0.031\" W (1.60mm x 0.80mm)", Unit Price (USD)=0.00321
R13: library part ERJ-3GEYJ470V, "RES SMD 47 OHM 5% 1/10W 0603", Digi-Key Part Number=P47GCT-ND, Manufacturer="Panasonic Electronic Components", Operating Temperature="-55°C ~ 155°C", Package / Case=0603, Power (Watts)="0.1W, 1/10W", Temperature Coefficient=±200ppm/°C, Tolerance=±5%, @ qty=1500, Composition="Thick Film", Datasheets=http://industrial.panasonic.com/www-cgi/jvcr13pz.cgi?E+PZ+3+AOA0001+ERJ3GEYJ470V+7+WW, Factory Stock=0, Failure Rate=-, Features="Automotive AEC-Q200", Height - Seated (Max)="0.022\" (0.55mm)", Image=//media.digikey.com/Photos/Panasonic%20Photos/MFG_ERJ-P6W%20Series.jpg, Minimum Quantity=1, Number of Terminations=2, Packaging="Cut Tape (CT)", Part Number=ERJ-3GEYJ470V, Part Status=Active, Quantity Available=383153, Series=ERJ, Size / Dimension="0.063\" L x 0.031\" W (1.60mm x 0.80mm)", Supplier Device Package=0603, Unit Price (USD)=0.00321
R14: library part ERJ-3GEYJ824V, "RES SMD 820K OHM 5% 1/10W 0603", Digi-Key Part Number=P820KGCT-ND, Manufacturer="Panasonic Electronic Components", Operating Temperature="-55°C ~ 155°C", Package / Case="0603 (1608 Metric)", Power (Watts)="0.1W, 1/10W", Supplier Device Package=0603, Temperature Coefficient=±200ppm/°C, Tolerance=±5%, @ qty=1500, Composition="Thick Film", Datasheets=http://industrial.panasonic.com/www-cgi/jvcr13pz.cgi?E+PZ+3+AOA0001+ERJ3GEYJ824V+7+WW, Factory Stock=0, Failure Rate=-, Features="Automotive AEC-Q200", Height - Seated (Max)="0.022\" (0.55mm)", Image=//media.digikey.com/Photos/Panasonic%20Photos/MFG_ERJ-P6W%20Series.jpg, Minimum Quantity=1, Number of Terminations=2, Packaging="Cut Tape (CT)", Part Number=ERJ-3GEYJ824V, Part Status=Active, Quantity Available=37901, Series=ERJ, Size / Dimension="0.063\" L x 0.031\" W (1.60mm x 0.80mm)", Unit Price (USD)=0.00321
R15: library part ERJ-3GEYJ122V, "RES SMD 1.2K OHM 5% 1/10W 0603", Digi-Key Part Number=P1.2KGCT-ND, Manufacturer="Panasonic Electronic Components", Operating Temperature="-55°C ~ 155°C", Package / Case=0603, Power (Watts)="0.1W, 1/10W", Temperature Coefficient=±200ppm/°C, Tolerance=±5%, @ qty=1500, Composition="Thick Film", Datasheets=http://industrial.panasonic.com/www-cgi/jvcr13pz.cgi?E+PZ+3+AOA0001+ERJ3GEYJ122V+7+WW, Factory Stock=0, Failure Rate=-, Features="Automotive AEC-Q200", Height - Seated (Max)="0.022\" (0.55mm)", Image=//media.digikey.com/Photos/Panasonic%20Photos/MFG_ERJ-P6W%20Series.jpg, Minimum Quantity=1, Number of Terminations=2, Packaging="Cut Tape (CT)", Part Number=ERJ-3GEYJ122V, Part Status=Active, Quantity Available=117934, Series=ERJ, Size / Dimension="0.063\" L x 0.031\" W (1.60mm x 0.80mm)", Supplier Device Package=0603, Unit Price (USD)=0.00321
R17: library part ERJ-3GEYJ122V, "RES SMD 1.2K OHM 5% 1/10W 0603", Digi-Key Part Number=P1.2KGCT-ND, Manufacturer="Panasonic Electronic Components", Operating Temperature="-55°C ~ 155°C", Package / Case="0603 (1608 Metric)", Power (Watts)="0.1W, 1/10W", Supplier Device Package=0603, Temperature Coefficient=±200ppm/°C, Tolerance=±5%, @ qty=1500, Composition="Thick Film", Datasheets=http://industrial.panasonic.com/www-cgi/jvcr13pz.cgi?E+PZ+3+AOA0001+ERJ3GEYJ122V+7+WW, Factory Stock=0, Failure Rate=-, Features="Automotive AEC-Q200", Height - Seated (Max)="0.022\" (0.55mm)", Image=//media.digikey.com/Photos/Panasonic%20Photos/MFG_ERJ-P6W%20Series.jpg, Minimum Quantity=1, Number of Terminations=2, Packaging="Cut Tape (CT)", Part Number=ERJ-3GEYJ122V, Part Status=Active, Quantity Available=117934, Series=ERJ, Size / Dimension="0.063\" L x 0.031\" W (1.60mm x 0.80mm)", Unit Price (USD)=0.00321
R19: library part ERJ-3GEYJ822V, "RES SMD 8.2K OHM 5% 1/10W 0603", Digi-Key Part Number=P8.2KGCT-ND, Manufacturer="Panasonic Electronic Components", Operating Temperature="-55°C ~ 155°C", Package / Case="0603 (1608 Metric)", Power (Watts)="0.1W, 1/10W", Supplier Device Package=0603, Temperature Coefficient=±200ppm/°C, Tolerance=±5%, @ qty=1500, Composition="Thick Film", Datasheets=http://industrial.panasonic.com/www-cgi/jvcr13pz.cgi?E+PZ+3+AOA0001+ERJ3GEYJ822V+7+WW, Factory Stock=0, Failure Rate=-, Features="Automotive AEC-Q200", Height - Seated (Max)="0.022\" (0.55mm)", Image=//media.digikey.com/Photos/Panasonic%20Photos/MFG_ERJ-P6W%20Series.jpg, Minimum Quantity=1, Number of Terminations=2, Packaging="Cut Tape (CT)", Part Number=ERJ-3GEYJ822V, Part Status=Active, Quantity Available=123890, Series=ERJ, Size / Dimension="0.063\" L x 0.031\" W (1.60mm x 0.80mm)", Unit Price (USD)=0.00321
R21: library part POT-0017, "Potentiometer, 100k, Log Taper, 16mm, Single Gang, TH RA", Manufacturer 1=Mammoth, Manufacturer 1 PN=B100K, Power (Watts)=0.25, Tolerance=0.05, Mounting Type="Through-Hole, Right Angle", Supplier 1="Mammoth Electronics", Supplier 1 PN=A100K, Taper=Logarithmic, TPN=POT-0017
R22: library part ERJ-3EKF5231V, "RES SMD 5.23K OHM 1% 1/10W 0603", Digi-Key Part Number=P5.23KHCT-ND, Manufacturer="Panasonic Electronic Components", Operating Temperature="-55°C ~ 155°C", Package / Case="0603 (1608 Metric)", Power (Watts)="0.1W, 1/10W", Supplier Device Package=0603, Temperature Coefficient=±100ppm/°C, Tolerance=±1%, @ qty=1500, Composition="Thick Film", Datasheets=http://industrial.panasonic.com/www-cgi/jvcr13pz.cgi?E+PZ+3+AOA0002+ERJ3EKF5231V+7+WW, Factory Stock=0, Failure Rate=-, Features="Automotive AEC-Q200", Height - Seated (Max)="0.022\" (0.55mm)", Image=//media.digikey.com/Photos/Panasonic%20Photos/MFG_ERJ-P6W%20Series.jpg, Minimum Quantity=1, Number of Terminations=2, Packaging="Cut Tape (CT)", Part Number=ERJ-3EKF5231V, Part Status=Active, Quantity Available=49513, Series=ERJ, Size / Dimension="0.063\" L x 0.031\" W (1.60mm x 0.80mm)", Unit Price (USD)=0.00379
R23: library part ERJ-3GEYJ474V, "RES SMD 470K OHM 5% 1/10W 0603", Digi-Key Part Number=P470KGCT-ND, Manufacturer="Panasonic Electronic Components", Operating Temperature="-55°C ~ 155°C", Package / Case="0603 (1608 Metric)", Power (Watts)="0.1W, 1/10W", Supplier Device Package=0603, Temperature Coefficient=±200ppm/°C, Tolerance=±5%, @ qty=1500, Composition="Thick Film", Datasheets=http://industrial.panasonic.com/www-cgi/jvcr13pz.cgi?E+PZ+3+AOA0001+ERJ3GEYJ474V+7+WW, Factory Stock=0, Failure Rate=-, Features="Automotive AEC-Q200", Height - Seated (Max)="0.022\" (0.55mm)", Image=//media.digikey.com/Photos/Panasonic%20Photos/MFG_ERJ-P6W%20Series.jpg, Minimum Quantity=1, Number of Terminations=2, Packaging="Cut Tape (CT)", Part Number=ERJ-3GEYJ474V, Part Status=Active, Quantity Available=18290, Series=ERJ, Size / Dimension="0.063\" L x 0.031\" W (1.60mm x 0.80mm)", Unit Price (USD)=0.00321
U1 U3: "General-Purpose Operational Amplifier, 7 to 36 V, 0 to 70 degC, 8-pin DIP (P8), Pb-Free (RoHS)", Manufacturer="Texas Instruments", Supplier Part Number 1=296-11107-5-ND, Total Supply Voltage(Max)(+5V is 5, +/-5V is 10)=36, Total Supply Voltage(Min)(+5V is 5, +/-5V is 10)=7, CMRR(Min)(dB)=70, Code_JEDEC=MS-001, ComponentLink1Description="Manufacturer URL", ComponentLink1URL=http://www.ti.com/, ComponentLink2Description=Datasheet, ComponentLink2URL=http://www.ti.com/lit/ds/symlink/ua741.pdf, ComponentLink3Description="Package Specification", ComponentLink3URL=http://www.ti.com/litv/pdf/mpdi001b, DatasheetVersion=SLOS094B, Eco-Plan="Pb-Free (RoHS)", GBW(Typ)(MHz)=1, IIB(Max)(pA)=800000, Iq per channel(Max)(mA)=2.8, Mounting Technology="Through Hole", Number of Channels=1, PackageDescription="8-Pin Plastic In-Line, Body 9.59 x 6.35 mm, Pitch 2.54 mm", PackageReference=P8, PackageVersion="4040082/E, 04/2010", PartNumber=UA741CP, Slew Rate(Typ)(V/us)=0.5, Sub Family="General Purpose Amplifier, High Supply Voltage Amplifier (>=30V)", Supplier 1=Digi-Key, Supplier 2=Farnell, Supplier 3=Newark, Supplier 4=Mouser, Supplier Part Number 2=1564944, Supplier Part Number 3=60K7043, Supplier Part Number 4=595-UA741CP, Vio (25C)(Max)(mV)=6
U2: "Dual General-Purpose Operational Amplifier, 10 to 30 V, 0 to 70 degC, 8-pin DIP (P8), Pb-Free (RoHS)", Manufacturer="Texas Instruments", Supplier Part Number 1=296-1414-5-ND, Total Supply Voltage(Max)(+5V is 5, +/-5V is 10)=30, Total Supply Voltage(Min)(+5V is 5, +/-5V is 10)=10, CMRR(Min)(dB)=70, Code_JEDEC=MS-001, ComponentLink1Description="Manufacturer URL", ComponentLink1URL=http://www.ti.com/, ComponentLink2Description=Datasheet, ComponentLink2URL=http://www.ti.com/lit/ds/symlink/rc4558.pdf, ComponentLink3Description="Package Specification", ComponentLink3URL=http://www.ti.com/litv/pdf/mpdi001b, DatasheetVersion=SLOS073F, Eco-Plan="Pb-Free (RoHS)", GBW(Typ)(MHz)=3, IIB(Max)(pA)=500000, Iq per channel(Max)(mA)=2.8, Mounting Technology="Through Hole", Number of Channels=2, PackageDescription="8-Pin Plastic In-Line, Body 9.59 x 6.35 mm, Pitch 2.54 mm", PackageReference=P8, PackageVersion="4040082/E, 04/2010", PartNumber=RC4558P, Slew Rate(Typ)(V/us)=1.7, Sub Family="General Purpose Amplifier, High Supply Voltage Amplifier (>=30V), Low Noise Amp (<=10nV/rtHz)", Supplier 1=Digi-Key, Supplier 2=Farnell, Supplier 3=Newark, Supplier 4=Mouser, Supplier Part Number 2=1106010, Supplier Part Number 3=60K6767, Supplier Part Number 4=595-RC4558P, Vio (25C)(Max)(mV)=6, Vn at 1kHz(Typ)(nV/rtHz)=8

## Nets (pads, with @x,y where several pads share a name; then routed paths per layer and width w, separated by ;. In a path a pad name is that pad's centre, name@x,y a point inside that pad or via, vN(x,y) a via of type N, cw(c..) or ccw(c..) an arc to the next point about the centre after c; other vN are vias at no path point)
GND: C1.2 C2.2 C5.2 C6.2 C7.2 C11.2 C13.2 C14.2 J1.C J3.S J4.S R1.2 R4.1 R5.1 R16.1 R17.1 R18.2 R21.3 SW1.3 SW1.7 U1.4 U2.4 U3.4
INPUT: J3.T SW1.2
NetC3_1: C3.1 R8.2 R9.1
NetC3_2: C3.2 R10.2 R11.1 U2.7
NetC4_1: C4.1 R5.2 SW1.1
NetC4_2: C4.2 R6.1
NetC5_1: C5.1 R9.2 U2.5
NetC6_1: C6.1 R12.1 R13.1
NetC7_1: C7.1 R14.1 R16.2 U3.7
NetC8_1: C8.1 R17.2 R20.1
NetC8_2: C8.2 C10.1 C12.2 D4.K D7.A R23.2 U3.6
NetC9_1: C9.1 R19.1
NetC9_2: C9.2 R11.2
NetC10_2: C10.2 R22.1
NetC11_1: C11.1 R20.3 R22.2
NetC12_1: C12.1 D2.A D5.K R23.1 U3.3
NetD1_A: D1.A R15.1
NetD1_K: D1.K SW1.5
NetD2_K: D2.K D3.A
NetD3_K: D3.K D4.A
NetD5_A: D5.A D6.K
NetD6_A: D6.A D7.K
NetJ4_T: J4.T SW1.6
NetR1_1: R1.1 U1.5
NetR1_3: R1.3 U1.1
NetR6_2: R6.2 R7.1 U2.2
NetR7_2: R7.2 R8.1 U2.1
NetR10_1: R10.1 R12.2 U2.6
NetR11_3: R11.3 R13.2
NetR18_1: R18.1 U3.5
NetR18_3: R18.3 U3.1
NetR19_2: R19.2 U3.2
NetR20_2: R20.2 R21.1
NetR21_2: R21.2 SW1.4
VBAT: J1.SW J2.1
VBAT_GND: J2.2 J3.R
VDD_9V: C1.1 C13.1 C14.1 R2.2 R3.2 R14.2 R15.2 U1.7 U2.8
VEXT_9V: J1.R R2.1
VMID_BUFFERED: U1.2 U1.6 U2.3
VMIDRAIL: C2.1 R3.1 R4.2 U1.3
pads on no net: U1.8 U3.8

## Text inside footprints (layer, text, board x,y; h text height)
J1: Top Overlay "R" at 925,-125 h60 r270; Top Overlay "C" at 1125,-125 h60 r270; Top Overlay "SW" at 1025,-125 h60 r270
J2: Top Overlay "-" at 2088.11,-1371.26 h98.43 r90; Top Overlay "+" at 2005.43,-1383.07 h98.43 r90
J3: Top Overlay "R" at 175,-1375 h60 r90; Top Overlay "S" at 275,-1375 h60 r90; Top Overlay "T" at 75,-1375 h60 r90
J4: Top Overlay "T" at 1695,-1375 h60 r90; Top Overlay "S" at 1795,-1375 h60 r90
R11: Mechanical 30 "Clearance 1.8mm" at 2009.98,191.51 h39.37
R20: Mechanical 30 "Clearance 1.8mm" at 1219.98,-158.49 h39.37
R21: Mechanical 30 "Clearance 1.8mm" at 429.98,191.51 h39.37
SW1: Top Overlay "1" at 800,-1375 h60 r90; Top Overlay "2" at 900,-1375 h60 r90; Top Overlay "3" at 1000,-1375 h60 r90; Top Overlay "4" at 1100,-1375 h60 r90; Top Overlay "5" at 1200,-1375 h60 r90; Top Overlay "6" at 1300,-1375 h60 r90; Top Overlay "7" at 1400,-1375 h60 r90